# Altium PCB UC-526 - 2.PcbDoc
Units mil, origin at the board's own origin, x right, y up, seen from the top; angles counter-clockwise.
Board outline 1574.8 x 1574.8 mil, 2 copper layers (Top Layer, Bottom Layer); 115 components, 127 nets, 531 pads, 22 vias.
Unrouted connection lines stored in the file: 2.
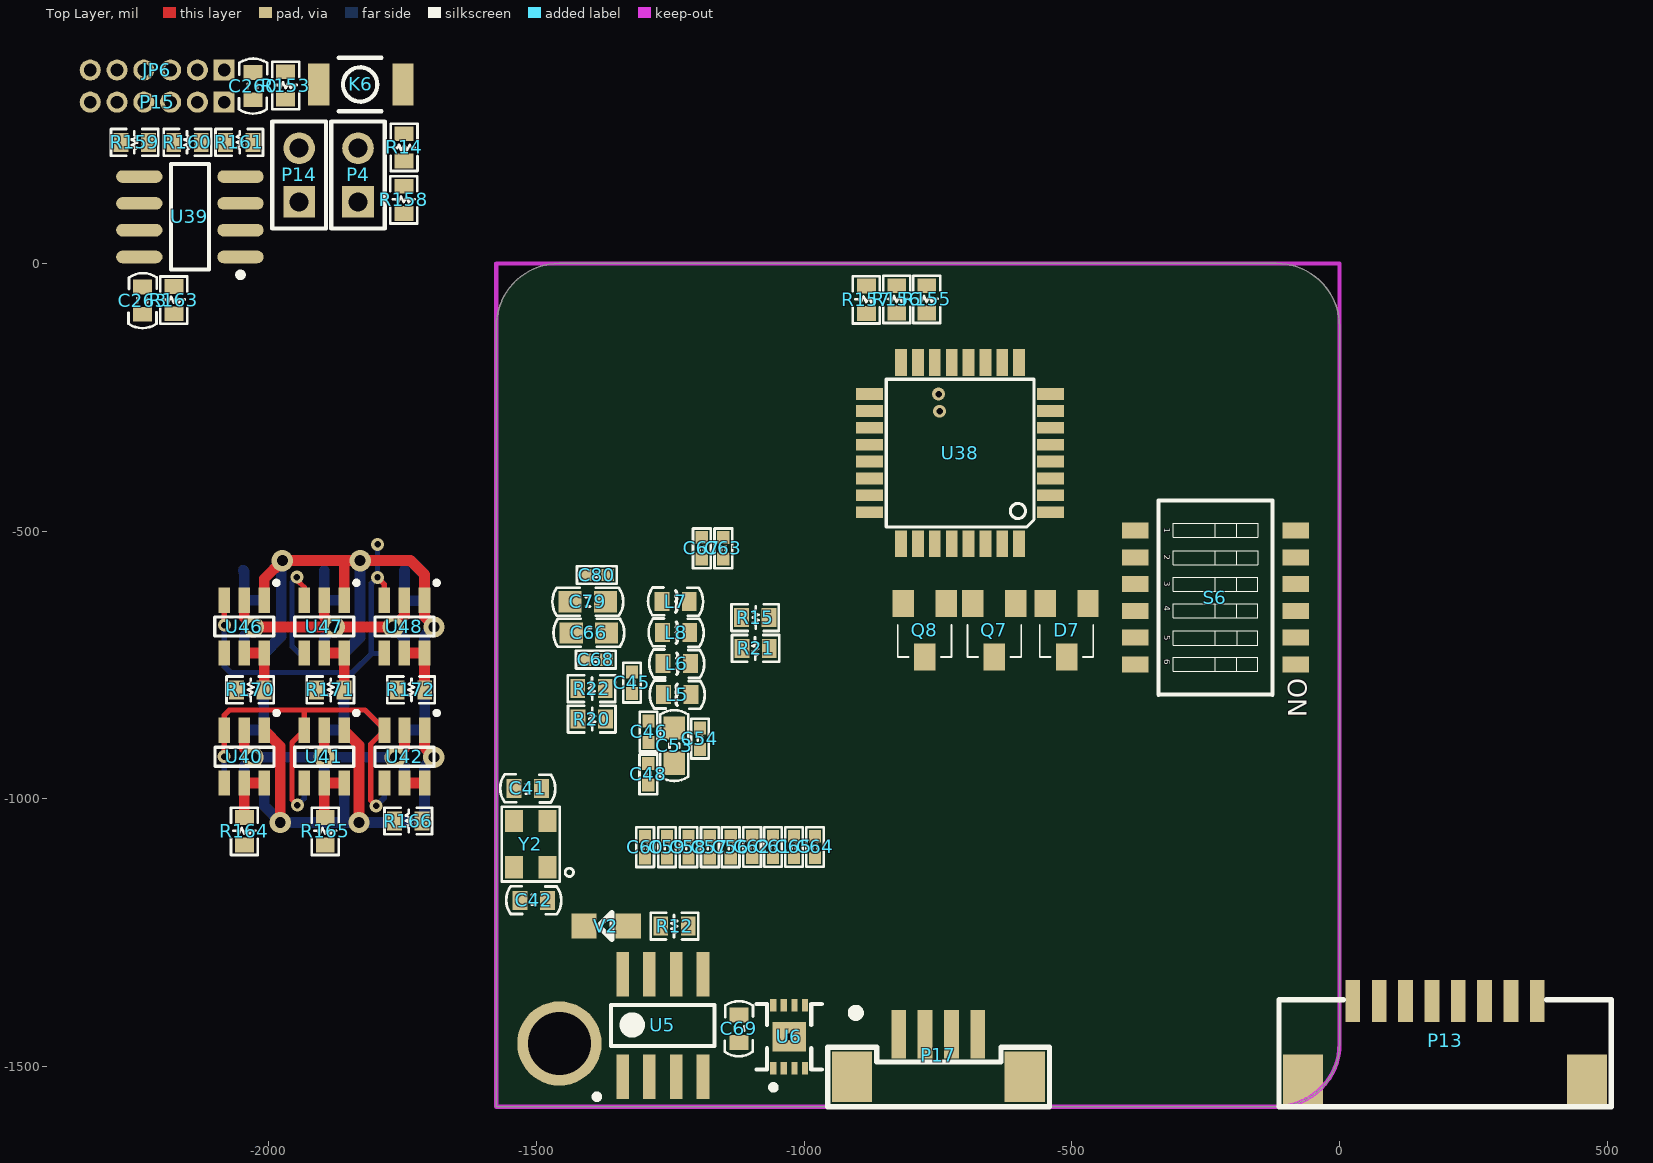
[diagram p0: Top Layer view]
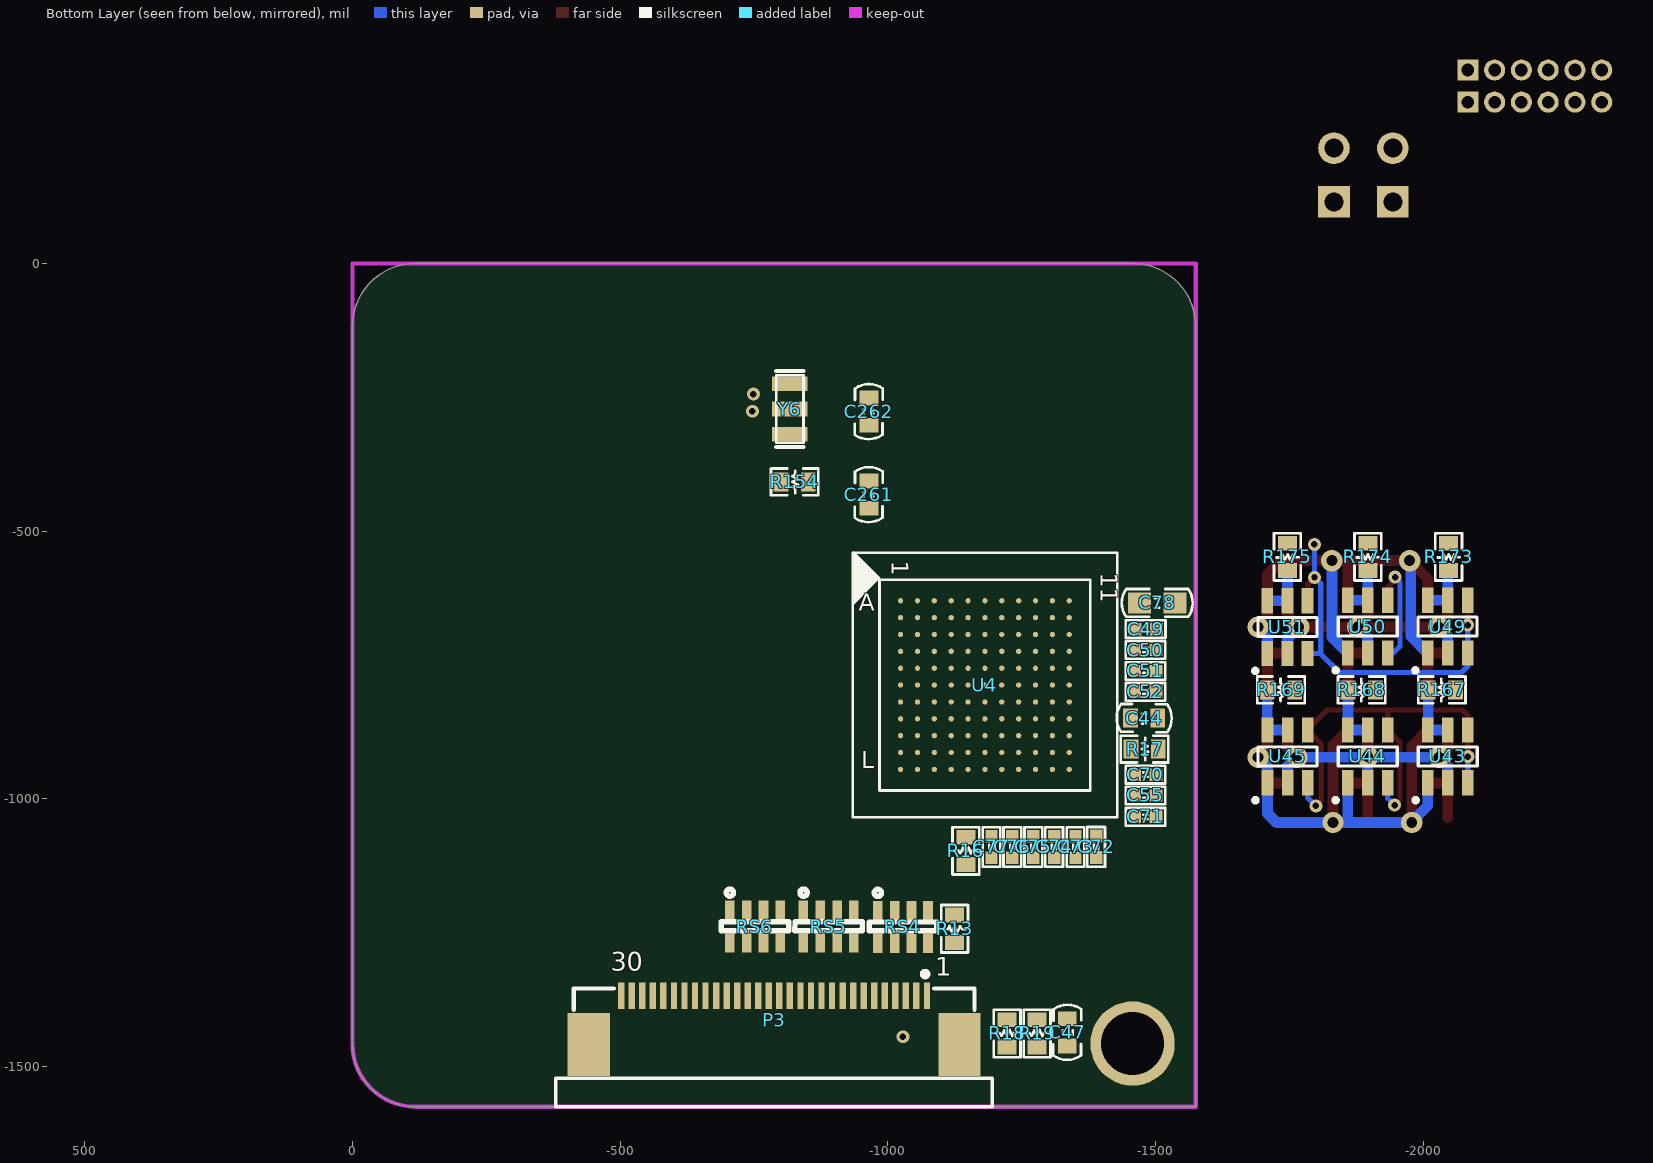
[diagram p1: Bottom Layer view, seen from below]

## Layer stack, top to bottom
Top Layer: signal copper 1.4
Dielectric: dielectric 12.6, FR-4, Dk 4.8
Bottom Layer: signal copper 1.4

## Board outline
-1574.8,-1574.8 -118.11,-1574.8 ccw(c-118.11,-1456.69) 0,-1456.69 0,-118.11 ccw(c-118.11,-118.11) -118.11,0 -1456.69,0 ccw(c-1456.69,-118.11) -1574.8,-118.11

## Design rules (kind name [scope] priority, off if disabled: settings)
Clearance [All] p1: gap=5
DiffPairsRouting [All] p1: maxlimit=10 minlimit=10 mostfreqgap=10 maxuncoupledlength=500
PolygonConnect [All] p1: connectstyle=Relief reliefconductorwidth=10 reliefentries=4 polygonreliefangle="90 Angle"
RoutingVias [All] p1: holewidth=28 width=50 viastyle="Through Hole" minholewidth=28 minwidth=50 maxholewidth=28 maxwidth=50
SilkscreenOverComponentPads [All] p1: minsilkscreentomaskgap=10
SolderMaskExpansion [All] p1: expansion=4
Width [All] p1: maxlimit=50 minlimit=5 preferedwidth=10
26 further rules are at their usual default settings.

## Classes and differential pairs
differential pair SST: +SST_P -SST_N

## Components (designator, comment, footprint, x,y, rotation, side; value= is the part's Value field where it differs from the comment)
C41 "12pF" 0603S-CAP -1515.89,-980.31 r180 top
C42 "12pF" 0603S-CAP -1504.71,-1189.31 r0 top
C44 "0.1u" 0603S-CAP -1478.39,-849 r0 bottom
C45 "0.1u" C0402 -1321.4,-782.99 r90 top
C46 "0.01u" C0402 -1290.4,-874.4 r270 top
C47 "0.1uF" 0603S-CAP -1334.8,-1435.8 r270 bottom
C48 "0.1u" C0402 -1290.8,-954 r270 top
C49 "0.01u" C0402 -1481.12,-683 r180 bottom
C50 "0.01u" C0402 -1480.8,-722 r180 bottom
C51 "0.01u" C0402 -1480.8,-761 r180 bottom
C52 "0.01u" C0402 -1480.8,-800 r180 bottom
C53 "2.2u" C0805S-CAP -1242.4,-900.4 r270 top
C54 "0.1u" C0402 -1194.4,-887.4 r270 top
C55 "0.01u" C0402 -1480.8,-993.5 r180 bottom
C56 "0.01u" C0402 -1136.9,-1090 r270 top
C57 "0.01u" C0402 -1175.82,-1090 r270 top
C58 "0.01u" C0402 -1215.82,-1090 r270 top
C59 "0.01u" C0402 -1255.82,-1090 r270 top
C60 "0.01u" C0402 -1296.82,-1090 r270 top
C61 "0.1u" C0402 -1057.91,-1089.71 r270 top
C62 "0.1u" C0402 -1096.91,-1089.71 r270 top
C63 "0.1u" C0402 -1150.8,-532 r270 top
C64 "0.1u" C0402 -979.48,-1089.71 r270 top
C65 "0.1u" C0402 -1018.91,-1089.71 r270 top
C66 "22u" C0805S-CAP -1401.8,-689.81 r180 top
C67 "0.1u" C0402 -1190.8,-532 r270 top
C68 "0.1u" C0402 -1388.8,-740 r180 top
C69 "0.1u" 0603S-CAP -1121.8,-1429 r270 top
C70 "0.1u" C0402 -1480.8,-954.58 r180 bottom
C71 "0.1u" C0402 -1480.8,-1033.5 r180 bottom
C72 "0.1u" C0402 -1388.9,-1089.4 r270 bottom
C73 "0.1u" C0402 -1350.25,-1089.71 r270 bottom
C74 "0.1u" C0402 -1310.32,-1089.71 r270 bottom
C75 "0.1u" C0402 -1271.32,-1089.71 r270 bottom
C76 "0.1u" C0402 -1232.32,-1089.71 r270 bottom
C77 "0.1u" C0402 -1193.32,-1089.71 r270 bottom
C78 "22u" C0805S-CAP -1502.8,-634 r180 bottom
C79 "22u" C0805S-CAP -1403.8,-631.81 r180 top
C80 "0.1u" C0402 -1386.8,-582 r180 top
C260 "0.1uF" C0603 -2028.8,331 r270 top
C261 "0.1uF" C0603 -964.2,-431.81 r270 bottom
C262 "0.1uF" C0603 -964.2,-276.81 r270 bottom
C263 "0.1u" C0603 -2234.8,-69.59 r270 top
D7 "SM712" SOT23-3 -509.8,-685 r180 top
JP6 "Header 3X2" MHDR1X6 -2082.8,361 r180 top
K6 "SW-PB" 157SW -1748.8,334 r0 top
L5 "磁珠" L0603 -1236.81,-805.4 r0 top
L6 "磁珠" L0603 -1237.81,-747.4 r180 top
L7 "磁珠" L0603 -1239.81,-631.4 r180 top
L8 "磁珠" L0603 -1238.81,-689.4 r180 top
P3 "30PIN" FH12-30S-0.5SH -787.4,-1412.95 r0 bottom locked
P4 "Header 2" HDR1X2 -1832.8,115 r90 top
P13 "Header 8" SH_1.25MM*8 196.85,-1524.87 r0 top
P14 "Header 2" HDR1X2 -1942.8,115 r90 top
P15 "FTDI Basic" MHDR1X6 -2082.8,301 r180 top
P17 "Header 4" SMT_1.25MM*4 -749.4,-1479.4 r180 top
Q7 "BSS138" "SOT-23 (STANDARD)" -604.8,-635 r180 top
Q8 "BSS138" "SOT-23 (STANDARD)" -734.8,-635 r180 top
R12 "10K" 0603S-RES -1241.81,-1237.4 r0 top
R13 "0" 0603S-RES -1124.4,-1242.4 r90 bottom
R14 "4.7K" 0603S-RES -1746.8,216.6 r90 top
R15 "4.7K" 0603S-RES -1091.28,-661.44 r180 top
R16 "4.7K" 0603S-RES -1145.4,-1096.93 r270 bottom
R17 "4.7K" 0603S-RES -1479.21,-907 r0 bottom
R18 "4.7K" 0603S-RES -1222.38,-1437.79 r270 bottom
R19 "4.7K" 0603S-RES -1278.38,-1437.79 r270 bottom
R20 "0" 0603S-RES -1396.39,-851 r180 top
R21 "6.04K-1%" 0603S-RES -1090.39,-719 r0 top
R22 "200-1%" 0603S-RES -1396.8,-794 r180 top
R153 "10K" R0603 -1967.8,332 r90 top
R154 "10K" R0603 -825.8,-408 r180 bottom
R155 "10K" R0603 -770.92,-67.28 r90 top
R156 "10K" R0603 -826.92,-67.28 r90 top
R157 "10K" R0603 -883.8,-68 r90 top
R158 "10K" R0603 -1747.4,118.6 r90 top
R159 "4.7K" R0603 -2249.8,226 r180 top
R160 "120" R0603 -2151.21,226 r180 top
R161 "4.7K" R0603 -2054.62,226 r0 top
R163 "10K" R0603 -2176.8,-68.59 r90 top
R164 "5.1" R0603 -2045,-1060.41 r90 top
R165 "5.1" R0603 -1894,-1060.41 r90 top
R166 "5.1" R0603 -1739,-1041.21 r0 top
R167 "5.1" R0603 -2034.21,-796.42 r0 bottom
R168 "5.1" R0603 -1884.55,-796.42 r0 bottom
R169 "5.1" R0603 -1733.96,-796.42 r0 bottom
R170 "5.1" R0603 -2034.21,-796.42 r0 top
R171 "5.1" R0603 -1884.55,-796.42 r0 top
R172 "5.1" R0603 -1733.96,-796.42 r0 top
R173 "5.1" R0603 -2047,-548 r270 bottom
R174 "5.1" R0603 -1896,-548 r270 bottom
R175 "5.1" R0603 -1746,-548 r270 bottom
RS4 "22" NC06-4 -980.5,-1208.24 r180 bottom
RS5 "22" NC06-4 -841.74,-1207.74 r180 bottom
RS6 "22" NC06-4 -704.23,-1207.74 r180 bottom
S6 "SW DIP-6" DIP_SW_6WAY_SMD -231.8,-624 r270 top
U4 "FX3_121_BUMP_0" 121_BGA_FX3 -1181.1,-787.4 r180 bottom
U5 "M24M02-DRMN6TP" SOIC127P600X175-8N -1263.8,-1423 r90 top
U6 "ATSHA204-MAH-DA-T" UDFN -1027.8,-1444 r90 top
U38 "ATMEGA328" TQFP32-08 -708.66,-354.33 r180 top locked
U39 "MAX485CSA" SOIC-8 -2146.72,87 r180 top
U40 "AL5802" SOT26 -2045,-921.21 r270 top
U41 "AL5802" SOT26 -1896,-921.21 r270 top
U42 "AL5802" SOT26 -1746,-921.21 r270 top
U43 "AL5802" SOT26 -2045.4,-920.64 r90 bottom
U44 "AL5802" SOT26 -1895.79,-920.64 r90 bottom
U45 "AL5802" SOT26 -1746.19,-920.64 r90 bottom
U46 "AL5802" SOT26 -2045.4,-678.21 r270 top
U47 "AL5802" SOT26 -1895.79,-678.21 r270 top
U48 "AL5802" SOT26 -1746.19,-678.21 r270 top
U49 "AL5802" SOT26 -2045,-678.21 r90 bottom
U50 "AL5802" SOT26 -1896,-678.21 r90 bottom
U51 "AL5802" SOT26 -1746,-679.21 r90 bottom
V2 "Red" LED0805S -1369.4,-1237.4 r180 top
Y2 "19.2MHZ" "爱普生晶振3.2×2.5MM - 无源" -1510.3,-1084.31 r90 top
Y6 "16MHz" RESONATOR-SMD -816.8,-272 r270 bottom

## Footprints (in the part's own frame and the unit in brackets; to place one, negate y for a bottom-side part, rotate by r counter-clockwise, add the part's x,y. Pads: shape width x height; smd on the part's side, far side on the other; paste and mask are expansions set on the pad)
121_BGA_FX3 [mil]
  round 9.85 smd: A1(-157.45,157.45) A2(-125.96,157.45) A3(-94.47,157.45) A4(-62.98,157.45) A5(-31.49,157.45) A6(0,157.45) A7(31.49,157.45) A8(62.98,157.45) A9(94.47,157.45) A10(125.96,157.45) A11(157.45,157.45) B1(-157.45,125.96) B2(-125.96,125.96) B3(-94.47,125.96) B4(-62.98,125.96) B5(-31.49,125.96) B6(0,125.96) B7(31.49,125.96) B8(62.98,125.96) B9(94.47,125.96) B10(125.96,125.96) B11(157.45,125.96) C1(-157.45,94.47) C2(-125.96,94.47) C3(-94.47,94.47) C4(-62.98,94.47) C5(-31.49,94.47) C6(0,94.47) C7(31.49,94.47) C8(62.98,94.47) C9(94.47,94.47) C10(125.96,94.47) C11(157.45,94.47) D1(-157.45,62.98) D2(-125.96,62.98) D3(-94.47,62.98) D4(-62.98,62.98) D5(-31.49,62.98) D6(0,62.98) D7(31.49,62.98) D8(62.98,62.98) D9(94.47,62.98) D10(125.96,62.98) D11(157.45,62.98) E1(-157.45,31.49) E2(-125.96,31.49) E3(-94.47,31.49) E4(-62.98,31.49) E5(-31.49,31.49) E6(0,31.49) E7(31.49,31.49) E8(62.98,31.49) E9(94.47,31.49) E10(125.96,31.49) E11(157.45,31.49) F1(-157.45,0) F2(-125.96,0) F3(-94.47,0) F4(-62.98,0) F5(-31.49,0) F6(0,0) F7(31.49,0) F8(62.98,0) F9(94.47,0) F10(125.96,0) F11(157.45,0) G1(-157.45,-31.49) G2(-125.96,-31.49) G3(-94.47,-31.49) G4(-62.98,-31.49) G5(-31.49,-31.49) G6(0,-31.49) G7(31.49,-31.49) G8(62.98,-31.49) G9(94.47,-31.49) G10(125.96,-31.49) G11(157.45,-31.49) H1(-157.45,-62.98) H2(-125.96,-62.98) H3(-94.47,-62.98) H4(-62.98,-62.98) H5(-31.49,-62.98) H6(0,-62.98) H7(31.49,-62.98) H8(62.98,-62.98) H9(94.47,-62.98) H10(125.96,-62.98) H11(157.45,-62.98) J1(-157.45,-94.47) J2(-125.96,-94.47) J3(-94.47,-94.47) J4(-62.98,-94.47) J5(-31.49,-94.47) J6(0,-94.47) J7(31.49,-94.47) J8(62.98,-94.47) J9(94.47,-94.47) J10(125.96,-94.47) J11(157.45,-94.47) K1(-157.45,-125.96) K2(-125.96,-125.96) K3(-94.47,-125.96) K4(-62.98,-125.96) K5(-31.49,-125.96) K6(0,-125.96) K7(31.49,-125.96) K8(62.98,-125.96) K9(94.47,-125.96) K10(125.96,-125.96) K11(157.45,-125.96) L1(-157.45,-157.45) L2(-125.96,-157.45) L3(-94.47,-157.45) L4(-62.98,-157.45) L5(-31.49,-157.45) L6(0,-157.45) L7(31.49,-157.45) L8(62.98,-157.45) L9(94.47,-157.45) L10(125.96,-157.45) L11(157.45,-157.45)
  silkscreen extent -247,-247 247,250
157SW [mil]
  rect 40x78 smd: 1(0,0) 2(-157.5,0)
  silkscreen extent -120,-50 -40,50
0603S-CAP [mm]
  rect 0.7x0.9 smd: 1(-0.65,0) 2(0.65,0)
  silkscreen extent -1.31,-0.67 1.31,0.67
0603S-RES [mm]
  rect 0.7x0.9 smd: 1(-0.65,0) 2(0.65,0)
  silkscreen extent -1.12,-0.64 1.12,0.64
C0402 [mil]
  rect 24x23 smd: 1(-20,0) 2(20,0)
  silkscreen extent -37,-17 37,17, body extent -20,-10 19,10, height 20
C0603 [mm]
  rect 0.7x0.9 smd: 1(0.65,0) 2(-0.65,0)
  silkscreen extent -1.31,-0.67 1.31,0.67
C0805S-CAP [mm]
  rect 1.1x1 smd: 1(0.838,0) 2(-0.838,0)
  silkscreen extent -1.68,-0.66 1.68,0.66
DIP_SW_6WAY_SMD [mm]
  rect 0.76x1.27 smd: 1(-3.175,-3.81) 2(-1.905,-3.81) 3(-0.635,-3.81) 4(0.635,-3.81) 5(1.905,-3.81) 6(3.175,-3.81) 7(3.175,3.81) 8(1.905,3.81) 9(0.635,3.81) 10(-0.635,3.81) 11(-1.905,3.81) 12(-3.175,3.81)
  silkscreen extent -4.6,-2.7 4.6,2.7
FH12-30S-0.5SH [mm]
  rect 0.3x1.25 smd: 1(-7.25,-1.162) 2(-6.75,-1.162) 3(-6.25,-1.162) 4(-5.75,-1.162) 5(-5.25,-1.162) 6(-4.75,-1.162) 7(-4.25,-1.162) 8(-3.75,-1.162) 9(-3.25,-1.162) 10(-2.75,-1.162) 11(-2.25,-1.162) 12(-1.75,-1.162) 13(-1.25,-1.162) 14(-0.75,-1.162) 15(-0.25,-1.162) 16(0.25,-1.162) 17(0.75,-1.162) 18(1.25,-1.162) 19(1.75,-1.162) 20(2.25,-1.162) 21(2.75,-1.162) 22(3.25,-1.162) 23(3.75,-1.162) 24(4.25,-1.162) 25(4.75,-1.162) 26(5.25,-1.162) 27(5.75,-1.162) 28(6.25,-1.162) 29(6.75,-1.162) 30(7.25,-1.162)
  rect 2x3 smd: 31(-8.79,1.163) 31(8.79,1.163)
  silkscreen extent -10.35,-2.31 10.35,4.11
HDR1X2 [mm]
  rect 1.5x1.5 hole 0.9: 1(0,0)
  round 1.5 hole 0.9: 2(2.54,0)
  silkscreen extent -1.27,-1.27 3.81,1.27
L0603 [mm]
  rect 0.7x0.9 smd: 1(-0.65,0) 2(0.65,0)
  silkscreen extent -1.31,-0.67 1.31,0.67
LED0805S [mm]
  rect 1.2x1.2 smd: 1(-1.05,0) 2(1.05,0)
  silkscreen extent -0.27,-0.64 0.36,0.63, body extent -0.98,-0.46 1.08,0.45, height 0.85
MHDR1X6 [mm]
  rect 1x1 hole 0.6: 1(0,0)
  round 1 hole 0.6: 2(1.27,0) 3(2.54,0) 4(3.81,0) 5(5.08,0) 6(6.35,0)
NC06-4 [mil]
  rect 18x36 smd: 1(94.4,-0.16) 2(63.39,-0.16) 3(31.9,-0.16) 4(0.4,-0.16) 5(0.4,-61.16) 6(31.9,-61.16) 7(63.39,-61.16) 8(94.4,-61.16)
  silkscreen extent -16,-38 111,40
R0603 [mm]
  rect 0.7x0.9 smd: 1(0.65,0) 2(-0.65,0)
  silkscreen extent -1.12,-0.64 1.12,0.64
RESONATOR-SMD [mm]
  rect 0.7x1.7 smd: 1(-1.2,0) 2(0,0) 3(1.2,0)
  silkscreen extent -1.8,-0.65 1.8,0.65
SH_1.25MM*8 [mm]
  rect 0.7x2 smd: 1(-4.375,3.75) 2(-3.125,3.75) 3(-1.875,3.75) 4(-0.625,3.75) 5(0.625,3.75) 6(1.875,3.75) 7(3.125,3.75) 8(4.375,3.75)
  rect 1.9x2.4 smd: 9(-6.731,0) 9(6.731,0)
  silkscreen extent -7.87,-1.27 7.87,3.81
SMT_1.25MM*4 [mm]
  rect 0.7x2.3 smd: 1(1.875,-1.025) 2(0.625,-1.025) 3(-0.625,-1.025) 4(-1.875,-1.025)
  rect 1.9x2.4 smd: 7(-4.1,1) 7(4.1,1)
  silkscreen extent -5.28,-2.16 5.25,2.42
SOIC127P600X175-8N [mm]
  rect 2.1x0.6 smd: 1(-2.425,1.905) 2(-2.425,0.635) 3(-2.425,-0.635) 4(-2.425,-1.905) 5(2.425,-1.905) 6(2.425,-0.635) 7(2.425,0.635) 8(2.425,1.905)
  silkscreen extent -3.5,-2.45 0.98,3.25, body extent -1.95,-2.45 1.95,2.45, height 1.75
SOIC-8 [mm]
  oval 2.2x0.6 smd: 1(-2.4,1.905) 2(-2.4,0.635) 3(-2.4,-0.635) 4(-2.4,-1.905) 5(2.4,-1.905) 6(2.4,-0.635) 7(2.4,0.635) 8(2.4,1.905)
  silkscreen extent -2.53,-2.5 0.9,2.88, body extent -2,-2.5 2,2.5, height 1.75
SOT23-3 [mil]
  rect 40x50 smd: 1(40,-50) 2(-40,-50) 3(0,50)
  silkscreen extent -50,-10 50,50, body extent -59,-52 59,46, height 42
SOT26 [mm]
  rect 1.2x0.55 smd: 1(-1.25,0.95) 2(-1.25,0) 3(-1.25,-0.95) 4(1.25,-0.95) 5(1.25,0) 6(1.25,0.95)
  silkscreen extent -2.17,-1.4 0.45,1.63
"SOT-23 (STANDARD)" [mil]
  rect 40x50 smd: D(40,100) G(0,0) S(80,0)
  silkscreen extent -10,40 90,100, body extent -19,-2 99,96, height 42
TQFP32-08 [mil]
  rect 50x22 smd: 1(-169,110.24) 2(-169,78.74) 3(-169,47.25) 4(-169,15.75) 5(-169,-15.74) 6(-169,-47.24) 7(-169,-78.74) 8(-169,-110.24) 17(169.01,-110.23) 18(169,-78.73) 19(169,-47.24) 20(169,-15.74) 21(169,15.75) 22(169,47.25) 23(169,78.74) 24(169,110.24)
  rect 22x50 smd: 9(-110.24,-169) 10(-78.74,-169) 11(-47.24,-168.99) 12(-15.74,-169) 13(15.75,-169) 14(47.25,-169) 15(78.74,-169) 16(110.24,-169) 25(110.24,169) 26(78.74,169) 27(47.25,169) 28(15.75,169) 29(-15.75,169) 30(-47.24,169) 31(-78.73,169) 32(-110.23,169)
  silkscreen extent -138,-138 138,138
UDFN [mm]
  rect 0.6x0.3 smd: 1(-1.5,0.75) 2(-1.5,0.25) 3(-1.5,-0.25) 4(-1.5,-0.75) 5(1.5,-0.75) 6(1.5,-0.25) 7(1.5,0.25) 8(1.5,0.75)
  rect 1.4x1.6 smd: 4(0,0)
  silkscreen extent -2.52,-1.55 1.55,1.55, body extent -1.5,-1 1.52,1, height 0.6
"爱普生晶振3.2×2.5MM - 无源" [mm]
  rect 1.05x0.85 smd: 1(-1.1,-0.8) 2(1.1,0.8) 3(1.1,-0.8) 4(-1.1,0.8)
  Top Layer pour cut-out: -1.778,1.372 -1.778,-1.372 1.778,-1.372 1.778,1.372
  silkscreen extent -1.78,-2.03 1.78,1.37

## Part data
C41 C42: library part "CAP CER SMT 4.3pF 0805", "CAP CER SMT 4.3pF 0805"
C44: library part Cap, "50V/8.2u/0805"
C45 C46 C48 C49 C50 C51 C52 C53 C54 C55 C56 C57 C58 C59 C60 C61 C62 C63 C64 C65 C66 C67 C68 C70 C71 C72 C73 C74 C75 C76 C77 C78 C79 C80: library part CAP0805, "Capacitor"
C47: library part "CAP SMT 0.1uF 16V X7R", "CAP SMT 0.1uF 16V X7R"
C69: library part CAP, "RC=1206"
C260 C261 C262: library part "CAP SMT C100nF25V10%X7R", "Capacitor"
C263: library part Cap, "Capacitor"
JP6: "Header, 3-Pin, Dual row"
K6: "Switch"
L5 L6 L7 L8: library part Inductor, "Inductor"
P3: library part "Header 30", "Header, 30-Pin"
P4 P14: "Header, 2-Pin"
P13: "Header, 8-Pin"
P15: library part ARDUINO_SERIAL_PROGRAMPTH
P17: "Header, 4-Pin"
Q7 Q8: library part NMOS
R12 R13 R14 R15 R16 R17 R18 R19 R20 R21 R22 R153 R154 R155 R156 R157 R158 R159 R160 R161 R163 R164 R165 R166 R167 R168 R169 R170 R171 R172 R173 R174 R175: library part Res2, "Resistor"
RS4 RS5 RS6: library part RN4
S6: "DIP Switch, 6 Position, SPST"
U5: library part 24LC64-I/SN, "IC EEPROM 64KBIT 400KHZ 8SOIC"
U6: library part AT24C128
U38: library part ATMEGA168
U39: library part MAX3485CSA
V2: library part LED0, "Typical INFRARED GaAs LED"
Y2: library part "XTAL 32.768KHZ", "Crystal, CRYSTAL 32.768KHZ 6PF SMD"
Y6: library part RESONATORSMD

## Free pads (board coordinates)
  round 157.48 hole 118.11: 0(-1456.69,-1456.69)

## Via types
v1: diameter 40, hole 20, Top Layer to Bottom Layer, tented both sides, 12 vias
v2: diameter 24, hole 12, Top Layer to Bottom Layer, tented both sides, 9 vias
v3: diameter 24, hole 12, Top Layer to Bottom Layer, 1 vias

## Nets (pads, with @x,y where several pads share a name; then routed paths per layer and width w, separated by ;. In a path a pad name is that pad's centre, name@x,y a point inside that pad or via, vN(x,y) a via of type N, cw(c..) or ccw(c..) an arc to the next point about the centre after c; other vN are vias at no path point)
A0: U38.23
A1: U38.24
A2: U38.25
A3: U38.26
A4: U38.27
A5: U38.28
A6: U38.19
A7: U38.22
AD1: R154.2 S6.1 U38.2
AD2: R155.2 S6.2 U38.9
AD3: R156.2 S6.3 U38.10
AD4: R157.2 S6.4 U38.11
AREF: C261.2 U38.20
AVDD: C53.2 C54.1 L6.2 U4.A7
CLK_OUT: U4.D6
D0_IO: P3.18
D1_IO: P3.17
D2: P13.5 S6.8 U38.32
D2_IO: P3.16
D3: P13.6 S6.7 U38.1
D3_IO: P3.15
D4_IO: P3.14 RS6.7
D5_IO: P3.12 RS6.8
D6_IO: P3.11 RS5.5
D7_IO: P3.10 RS5.6
D8: R163.1 U38.12 U39.2 U39.3
D8_IO: P3.9 RS5.7
D9: Q7.G U38.13
D9_IO: P3.8 RS5.8
D10: Q8.G U38.14
D10_IO: P3.7 RS4.5
D11_IO: P3.6 RS4.6
DTR: C260.1 P15.1
FRV_IO: P3.4 RS4.8
FX3_CTL0: P3.23 U4.K8
FX3_CTL1: R13.2 U4.K7
FX3_CTL2: P3.26 U4.J7
FX3_CTL3: U4.H7
FX3_CTL4_SW: U4.G7
FX3_CTL5: U4.G6
FX3_CTL6: U4.K6
FX3_CTL7: U4.H8
FX3_CTL8: U4.G5 V2.2
FX3_CTL11: RS4.2 U4.J5
FX3_CTL12: RS4.1 U4.H5
FX3_CTL15: R16.2 U4.L8
FX3_DQ0: RS6.2 U4.F10
FX3_DQ1: RS6.1 U4.F9
FX3_DQ2: RS5.4 U4.F7
FX3_DQ3: RS5.3 U4.G10
FX3_DQ4: RS5.2 U4.G9
FX3_DQ5: RS5.1 U4.F8
FX3_DQ6: RS4.4 U4.H10
FX3_DQ7: RS4.3 U4.H9
FX3_DQ8: U4.J10
FX3_DQ9: U4.J9
FX3_DQ10: U4.K11
FX3_DQ11: U4.L10
FX3_DQ12: U4.K10
FX3_DQ13: U4.K9
FX3_DQ14: U4.J8
FX3_DQ15: U4.G8
FX3_I2S_SCL: P3.21 R19.1 U4.D9 U5.6 U6.6
FX3_I2S_SDA: P3.22 R18.1 U4.D10 U5.5 U6.5
FX3_PCLK: RS6.4 U4.J6
FX3_RESET: C44.2 R17.2 U4.C5
FX3_SPI-MISO_UART-TX: U4.C2
FX3_SPI-MOSI_UART-RX: U4.D5
FX3_SPI-SCK_UART-RTS: U4.D4
FX3_SPI-SSN_UART-CTS: U4.C1
GND: C41.1 C42.1 C44.1 C45.2 C46.2 C47.1 C48.2 C49.2 C50.2 C51.2 C52.2 C53.1 C54.2 C55.2 C56.2 C57.2 C58.2 C59.2 C60.2 C61.2 C62.2 C64.2 C65.2 C66.1 C68.2 C69.2 C70.2 C71.2 C72.2 C73.2 C74.2 C75.2 C76.2 C77.2 C78.1 C79.1 C80.2 C261.1 C262.2 C263.1 D7.3 JP6.6 K6.1 P3.1 P3.13 P3.24 P3.25 P13.1 P13.4 P13.7 P14.2 P15.5 P15.6 P17.4 Q7.S Q8.S R20.2 R21.2 R22.2 R158.1 R161.1 R164.2 R165.2 R166.2 R167.2 R168.2 R169.2 R170.2 R171.2 R172.2 R173.2 R174.2 R175.2 S6.9 S6.10 S6.11 S6.12 U4.A1 U4.A8 U4.B2 U4.B4 U4.B7 U4.B8 U4.B9 U4.D8 U4.E2 U4.E6 U4.G1 U4.G11 U4.K3 U4.K4 U4.L1 U4.L2 U4.L3 U4.L6 U4.L11 U5.4 U6.4 U38.3 U38.5 U38.21 U39.5 U40.4 U41.4 U42.4 U43.4 U44.4 U45.4 U46.4 U47.4 U48.4 U49.4 U50.4 U51.4 Y6.2
  other v3: -1027.8,-1444
LIV_IO: P3.5 RS4.7
MISO: JP6.4 U38.16
MOSI: JP6.3 U38.15
NetC45_1: C45.1 C46.1 L5.1 U4.B6
NetP4_1: P4.1 R14.1
NetP4_2: P4.2 U4.G4
NetQ7_D: Q7.D U40.3 U41.3 U42.3 U43.3 U44.3 U45.3 | length 892.3
  Top Layer w10: v2@-2082.4,-920.52 U40.3 -2082.4,-843.32 -2073,-833.92 -1820,-833.92 U42.3@-1779,-874.92 ; v2(-1946.02,-1011.55) -1956,-1001.57 -1956,-894.59 U41.3 -1933.4,-835.32 ; v2(-1799,-1012.92) -1809,-1002.92 -1809,-897.59 U42.3
  Bottom Layer w10: U43.3 v2(-2082.8,-920.92) ; v2(-1946.02,-1011.55) -1933.19,-998.73 U44.3 ; v2(-1799,-1012.92) -1783.59,-997.51 U45.3
NetQ8_D: Q8.D U46.3 U47.3 U48.3 U49.3 U50.3 U51.3 | length 933.1
  Top Layer w10: v2@-2083,-674.92 -2082.8,-674.72 U46.3 U46.3@-2082.8,-622.12 ; v2@-1946,-591.92 -1933.19,-604.73 U47.3 ; v2(-1796.5,-586.42) -1783.59,-599.33 U48.3
  Bottom Layer w10: v2(-2082.4,-675.52) U49.3 -2082.4,-752.52 -2071,-763.92 -1843,-763.92 -1808,-728.92 ; -1956,-614.92 -1956,-639.92 ; v2(-1947,-585.92) -1956,-594.92 -1956,-639.92 ; U50.3 -1943.5,-727.42 -1956,-714.92 -1956,-639.92 ; v2@-1796.5,-524.67 v2(-1796.5,-586.42) -1808,-597.92 -1808,-728.92 ; U51.3 -1807.5,-728.42 -1808,-728.92
  other v2: -1796.25,-524.67
NetR12_1: R12.1 V2.1
NetR15_1: R15.1 U4.H4
NetR21_1: R21.1 U4.C8
NetR22_1: R22.1 U4.B3
NetR164_1: R164.1 U40.5 U40.6 | length 101.8
  Top Layer w20: R164.1 U40.5 U40.6
NetR165_1: R165.1 U41.5 U41.6 | length 99.8
  Top Layer w20: R165.1@-1896,-1032.82 U41.5 U41.6
NetR166_1: R166.1 U42.5 U42.6 | length 37.4
  Top Layer w20: U42.5 U42.6
NetR167_1: R167.1 U43.5 U43.6 | length 112.7
  Bottom Layer w20: U43.5 U43.6 -2008.62,-870.81 R167.1
NetR168_1: R168.1 U44.5 U44.6 | length 112.6
  Bottom Layer w20: U44.5 U44.6 -1858.96,-870.86 R168.1
NetR169_1: R169.1 U45.5 U45.6 | length 112
  Bottom Layer w20: U45.5 U45.6 ; U45.6@-1708.37,-871.01 R169.1
NetR170_1: R170.1 U46.5 U46.6 | length 105.8
  Top Layer w20: U46.5 U46.6 R170.1@-2008,-795.8
NetR171_1: R171.1 U47.5 U47.6 | length 105.8
  Top Layer w20: U47.5 U47.6 R171.1@-1858.39,-795.85
NetR172_1: R172.1 U48.5 U48.6 | length 106.6
  Top Layer w20: U48.5 U48.6 -1708.79,-796 R172.1
NetR173_1: R173.1 U49.5 U49.6 | length 93.6
  Bottom Layer w20: R173.1 -2045,-575.59 U49.5 U49.6
NetR174_1: R174.1 U50.5 U50.6 | length 91.9
  Bottom Layer w20: R174.1@-1896,-574.51 U50.5 U50.6
NetR175_1: R175.1 U51.5 U51.6 | length 93.8
  Bottom Layer w20: R175.1 U51.5 U51.6
OSC_IN: U38.7 Y6.3
  other v2: -746.8,-276
OSC_OUT: U38.8 Y6.1
  other v2: -748.8,-244
OTG_ID: R20.1 U4.C9
OUT1: P17.2 U46.1 U47.1 U48.1 U49.1 U50.1 U51.1 | length 965.1
  Top Layer w20: U46.1 -2008,-588.92 v1(-1974,-554.92) -1735,-554.92 -1708.79,-581.13 U48.1 -1708.79,-660.02 v1@-1690.89,-677.92 ; U47.1 -1858.39,-560.53
  Bottom Layer w20: U49.1 -1976,-695.82 v1@-1976,-554.92 ; U50.1 -1829,-697.82 v1(-1829,-554.92) ; U51.1 -1708.6,-695.63 v1@-1690.89,-677.92
  other v1: -1690.89,-678.92
OUT2: P17.3 U40.1 U41.1 U42.1 U43.1 U44.1 U45.1 | length 974
  Top Layer w20: U40.1 -1977.78,-901.81 v1(-1977.78,-1043.92) ; U41.1 -1831,-899.59 v1(-1831,-1043.92) ; U42.1 -1708.6,-904.4 v1(-1691.08,-921.92) ; v1@-1691.48,-922.33 v1@-1690.89,-922.92
  Bottom Layer w20: U43.1 -2008,-1012.92 -1977,-1043.92 v1(-1831,-1043.92) -1725.55,-1043.92 -1708.79,-1027.16 U45.1 -1708.79,-939.63 v1(-1691.08,-921.92) ; -1858.39,-1043.53 U44.1
PCK_IO: P3.20 RS6.5
RESET: C260.2 JP6.1 K6.2 R153.2 U38.29
RX/B: D7.1 P13.3 R160.2 R161.2 U39.7
RXI: P15.4 U38.30 U39.1
RXVDDQ: C79.2 C80.1 L7.2 U4.A2
SCK: JP6.5 U38.17
SST_N: C67.2 U4.A6
SST_P: C63.2 U4.A5
STB_IO: P3.2
TIGG_IO: P3.3 R13.1
TX/A: D7.2 P13.2 R159.2 R160.1 U39.6
TXO: P15.3 U38.31 U39.4
TXVDDQ: C66.2 C68.1 L8.2 U4.B5
USB_DS2_DM: U4.A10
USB_DS2_DP: U4.A9
USB_DS2_RXM: U4.A4
USB_DS2_RXP: U4.A3
USB_DS2_TXM: C67.1
USB_DS2_TXP: C63.1
UTIGGER: P14.1 R158.2 S6.5 S6.6
VCC(+3.3V): C47.2 C55.1 C56.1 C57.1 C58.1 C59.1 C60.1 C69.1 C70.1 C71.1 C72.1 C73.1 C74.1 C75.1 C76.1 C77.1 L5.2 P3.27 P3.28 P3.29 P3.30 R12.2 R14.2 R15.2 R16.1 R17.1 R18.2 R19.2 U4.B1 U4.C11 U4.E3 U4.E10 U4.F1 U4.H11 U4.L9 U5.8 U6.8
VCC(+5V): C48.1 C262.1 C263.2 JP6.2 P15.2 R153.1 R154.1 R155.1 R156.1 R157.1 R159.1 R163.2 U4.E11 U38.4 U38.6 U38.18 U39.8
VCC_9V: P13.8 P17.1 U40.2 U41.2 U42.2 U43.2 U44.2 U45.2 U46.2 U47.2 U48.2 U49.2 U50.2 U51.2 | length 1190.3
  Top Layer w20: U46.2 -2045.4,-661.52 v1(-2028,-678.92) v1(-1877,-678.92) ; U40.2 -2045,-905.92 v1(-2029,-921.92) ; v1(-1896,-920.92) U41.2 ; U47.2 -1895.79,-660.13 v1(-1877,-678.92) ; v1(-1763,-921.92) -1746,-904.92 U42.2 ; U48.2 -1746.19,-658.11 v1(-1767,-678.92) v1(-1877,-678.92)
  Bottom Layer w20: U43.2 -2045.4,-938.32 v1(-2029,-921.92) v1(-1763,-921.92) -1746.19,-938.73 U45.2 ; U49.2 -2045,-695.92 v1(-2028,-678.92) ; U50.2 -1896,-697.92 v1(-1877,-678.92) ; U44.2 v1@-1895.79,-922.13 ; v1(-1767,-678.92) -1746,-699.92 U51.2
VDD(+1.2V): C49.1 C50.1 C51.1 C52.1 C61.1 C62.1 C64.1 C65.1 C78.2 L6.1 L7.1 L8.1 U4.B10 U4.C3 U4.E9 U4.F11 U4.H1 U4.J11 U4.L5 U4.L7
XCK_IO: P3.19
XTAL_IN: C42.2 U4.C6 Y2.1
XTAL_OUT: C41.2 U4.C7 Y2.2
pads on no net: P3.31 P13.9 P17.7 RS6.3 RS6.6 U4.A11 U4.B11 U4.C4 U4.C10 U4.D1 U4.D2 U4.D3 U4.D7 U4.D11 U4.E1 U4.E4 U4.E5 U4.E7 U4.E8 U4.F2 U4.F3 U4.F4 U4.F5 U4.F6 U4.G2 U4.G3 U4.H2 U4.H3 U4.H6 U4.J1 U4.J2 U4.J3 U4.J4 U4.K1 U4.K2 U4.K5 U4.L4 U5.1 U5.2 U5.3 U5.7 U6.1 U6.2 U6.3 U6.7 Y2.3 Y2.4

## Keep-outs
Keep-Out Layer:
  lines w7.87: -1574.8,-1574.8 -1574.8,0 0,0 0,-1456.69 cw(c-118.11,-1456.69) -118.11,-1574.8 -1574.8,-1574.8

## Silkscreen, mask and mechanical layers (free items; w line width, h text height)
Mechanical 13:
  lines w7.87: -873.4,-787.4 -787.4,-787.4 -787.4,-846.4 ; -590.55,-590.55 0,-590.55 0,0 -590.55,0 -590.55,-590.55

## Text inside footprints (layer, text, board x,y; h text height)
P3: Bottom Overlay "1" at -1088.4,-1341.95 h60; Bottom Overlay "30" at -482.4,-1332.95 h60
S6: Top Overlay "ON" at -107.8,-775 h60 r270; Top Overlay "4" at -331.8,-639 h19.68 r270; Top Overlay "3" at -331.8,-594 h19.68 r270; Top Overlay "2" at -331.8,-544 h19.68 r270; Top Overlay "1" at -331.8,-494 h19.68 r270; Top Overlay "5" at -331.8,-694 h19.68 r270; Top Overlay "6" at -331.8,-739 h19.68 r270
U4: Bottom Overlay "1" at -995.9,-554.9 h55 r90; Bottom Overlay "11" at -1386.1,-577.4 h55 r90; Bottom Overlay "A" at -945.5,-659.8 h55; Bottom Overlay "L" at -950.5,-953.8 h55; Mechanical 15 "1" at -1016.1,-572.4 h55; Mechanical 15 "11" at -1331.1,-577.4 h55; Mechanical 15 "L" at -952.1,-962.4 h55; Mechanical 15 "A" at -951.1,-627.4 h55; Mechanical 16 "G11" at -1338.55,-785.29 h55; Mechanical 16 "L11" at -1338.55,-911.25 h55; Mechanical 16 "B7" at -1212.59,-639.04 h55; Mechanical 16 "D8" at -1244.08,-702.02 h55; Mechanical 16 "B9" at -1275.57,-639.04 h55; Mechanical 16 "B8" at -1244.08,-639.04 h55; Mechanical 16 "A8" at -1244.08,-607.55 h55; Mechanical 16 "L3" at -1086.63,-922.45 h55; Mechanical 16 "K4" at -1118.12,-890.96 h55; Mechanical 16 "G1" at -1023.65,-796.49 h55; Mechanical 16 "K3" at -1086.63,-890.96 h55; Mechanical 16 "L1" at -1023.65,-922.45 h55; Mechanical 16 "L2" at -1055.14,-922.45 h55; Mechanical 16 "E2" at -1055.14,-733.51 h55; Mechanical 16 "A1" at -1023.65,-607.55 h55; Mechanical 16 "L6" at -1181.1,-922.45 h55; Mechanical 16 "B5" at -1149.61,-639.04 h55; Mechanical 16 "A2" at -1055.14,-607.55 h55; Mechanical 16 "C11" at -1338.55,-659.33 h55; Mechanical 16 "B1" at -1023.65,-639.04 h55; Mechanical 16 "C6" at -1181.1,-670.53 h55; Mechanical 16 "E6" at -1181.1,-733.51 h55; Mechanical 16 "B4" at -1118.12,-639.04 h55; Mechanical 16 "B2" at -1055.14,-639.04 h55; Mechanical 16 "C7" at -1212.59,-670.53 h55; Mechanical 16 "L4" at -1118.12,-922.45 h55; Mechanical 16 "L8" at -1244.08,-922.45 h55; Mechanical 16 "H4" at -1118.12,-827.98 h55; Mechanical 16 "G4" at -1118.12,-796.49 h55; Mechanical 16 "A3" at -1086.63,-607.55 h55; Mechanical 16 "A9" at -1275.57,-607.55 h55; Mechanical 16 "A10" at -1307.06,-596.35 h55; Mechanical 16 "A7" at -1212.59,-607.55 h55; Mechanical 16 "E11" at -1338.55,-722.31 h55; Mechanical 16 "A4" at -1118.12,-607.55 h55; Mechanical 16 "D10" at -1307.06,-690.82 h55; Mechanical 16 "D9" at -1275.57,-702.02 h55; Mechanical 16 "F11" at -1338.55,-753.8 h55; Mechanical 16 "J11" at -1338.55,-848.27 h55; Mechanical 16 "C3" at -1086.63,-670.53 h55; Mechanical 16 "H1" at -1023.65,-827.98 h55; Mechanical 16 "L5" at -1149.61,-922.45 h55; Mechanical 16 "L7" at -1212.59,-922.45 h55; Mechanical 16 "B10" at -1307.06,-627.84 h55; Mechanical 16 "E9" at -1275.57,-733.51 h55; Mechanical 16 "C1" at -1023.65,-670.53 h55; Mechanical 16 "D6" at -1181.1,-702.02 h55; Mechanical 16 "D7" at -1212.59,-702.02 h55; Mechanical 16 "D5" at -1149.61,-702.02 h55; Mechanical 16 "D3" at -1086.63,-702.02 h55; Mechanical 16 "C2" at -1055.14,-670.53 h55; Mechanical 16 "K7" at -1212.59,-890.96 h55; Mechanical 16 "A6" at -1181.1,-607.55 h55; Mechanical 16 "G7" at -1212.59,-796.49 h55; Mechanical 16 "A5" at -1149.61,-607.55 h55; Mechanical 16 "H7" at -1212.59,-827.98 h55; Mechanical 16 "B3" at -1086.63,-639.04 h55; Mechanical 16 "C8" at -1244.08,-670.53 h55; Mechanical 16 "J7" at -1212.59,-859.47 h55; Mechanical 16 "J6" at -1181.1,-859.47 h55; Mechanical 16 "K8" at -1244.08,-890.96 h55; Mechanical 16 "D4" at -1118.12,-702.02 h55; Mechanical 16 "D1" at -1023.65,-702.02 h55; Mechanical 16 "C5" at -1149.61,-670.53 h55; Mechanical 16 "C4" at -1118.12,-670.53 h55; Mechanical 16 "D2" at -1055.14,-702.02 h55; Mechanical 16 "B6" at -1181.1,-639.04 h55; Mechanical 16 "F6" at -1181.1,-765 h55; Mechanical 16 "E7" at -1212.59,-733.51 h55; Mechanical 16 "C10" at -1307.06,-659.33 h55; Mechanical 16 "E8" at -1244.08,-733.51 h55; Mechanical 16 "B11" at -1338.55,-627.84 h55; Mechanical 16 "J2" at -1055.14,-859.47 h55; Mechanical 16 "H2" at -1055.14,-827.98 h55; Mechanical 16 "G3" at -1086.63,-796.49 h55; Mechanical 16 "H3" at -1086.63,-827.98 h55; Mechanical 16 "F9" at -1275.57,-765 h55; Mechanical 16 "H5" at -1149.61,-827.98 h55; Mechanical 16 "H6" at -1181.1,-827.98 h55; Mechanical 16 "H8" at -1244.08,-827.98 h55; Mechanical 16 "K5" at -1149.61,-890.96 h55; Mechanical 16 "G5" at -1149.61,-796.49 h55; Mechanical 16 "F7" at -1212.59,-765 h55; Mechanical 16 "K10" at -1307.06,-879.76 h55; Mechanical 16 "J8" at -1244.08,-859.47 h55; Mechanical 16 "H10" at -1307.06,-816.78 h55; Mechanical 16 "G10" at -1307.06,-785.29 h55; Mechanical 16 "K11" at -1338.55,-879.76 h55; Mechanical 16 "G9" at -1275.57,-796.49 h55; Mechanical 16 "J5" at -1149.61,-859.47 h55; Mechanical 16 "H9" at -1275.57,-827.98 h55; Mechanical 16 "F10" at -1307.06,-753.8 h55; Mechanical 16 "J9" at -1275.57,-859.47 h55; Mechanical 16 "K9" at -1275.57,-890.96 h55; Mechanical 16 "K6" at -1181.1,-890.96 h55; Mechanical 16 "G6" at -1181.1,-796.49 h55; Mechanical 16 "J10" at -1307.06,-848.27 h55; Mechanical 16 "K1" at -1023.65,-890.96 h55; Mechanical 16 "F3" at -1086.63,-765 h55; Mechanical 16 "F8" at -1244.08,-765 h55; Mechanical 16 "L10" at -1307.06,-911.25 h55; Mechanical 16 "G8" at -1244.08,-796.49 h55; Mechanical 16 "E1" at -1023.65,-733.51 h55; Mechanical 16 "K2" at -1055.14,-890.96 h55; Mechanical 16 "F5" at -1149.61,-765 h55; Mechanical 16 "G2" at -1055.14,-796.49 h55; Mechanical 16 "E5" at -1149.61,-733.51 h55; Mechanical 16 "E4" at -1118.12,-733.51 h55; Mechanical 16 "J1" at -1023.65,-859.47 h55; Mechanical 16 "J3" at -1086.63,-859.47 h55; Mechanical 16 "F4" at -1118.12,-765 h55; Mechanical 16 "J4" at -1118.12,-859.47 h55; Mechanical 16 "H11" at -1338.55,-816.78 h55; Mechanical 16 "L9" at -1275.57,-922.45 h55; Mechanical 16 "F1" at -1023.65,-765 h55; Mechanical 16 "E3" at -1086.63,-733.51 h55; Mechanical 16 "F2" at -1055.14,-765 h55; Mechanical 16 "C9" at -1275.57,-670.53 h55; Mechanical 16 "A11" at -1338.55,-596.35 h55; Mechanical 16 "D11" at -1338.55,-690.82 h55; Mechanical 16 "E10" at -1307.06,-722.31 h55